# EAGLE board LargePanel_V01 (EAGLE 9.0.1), part 1 of 2
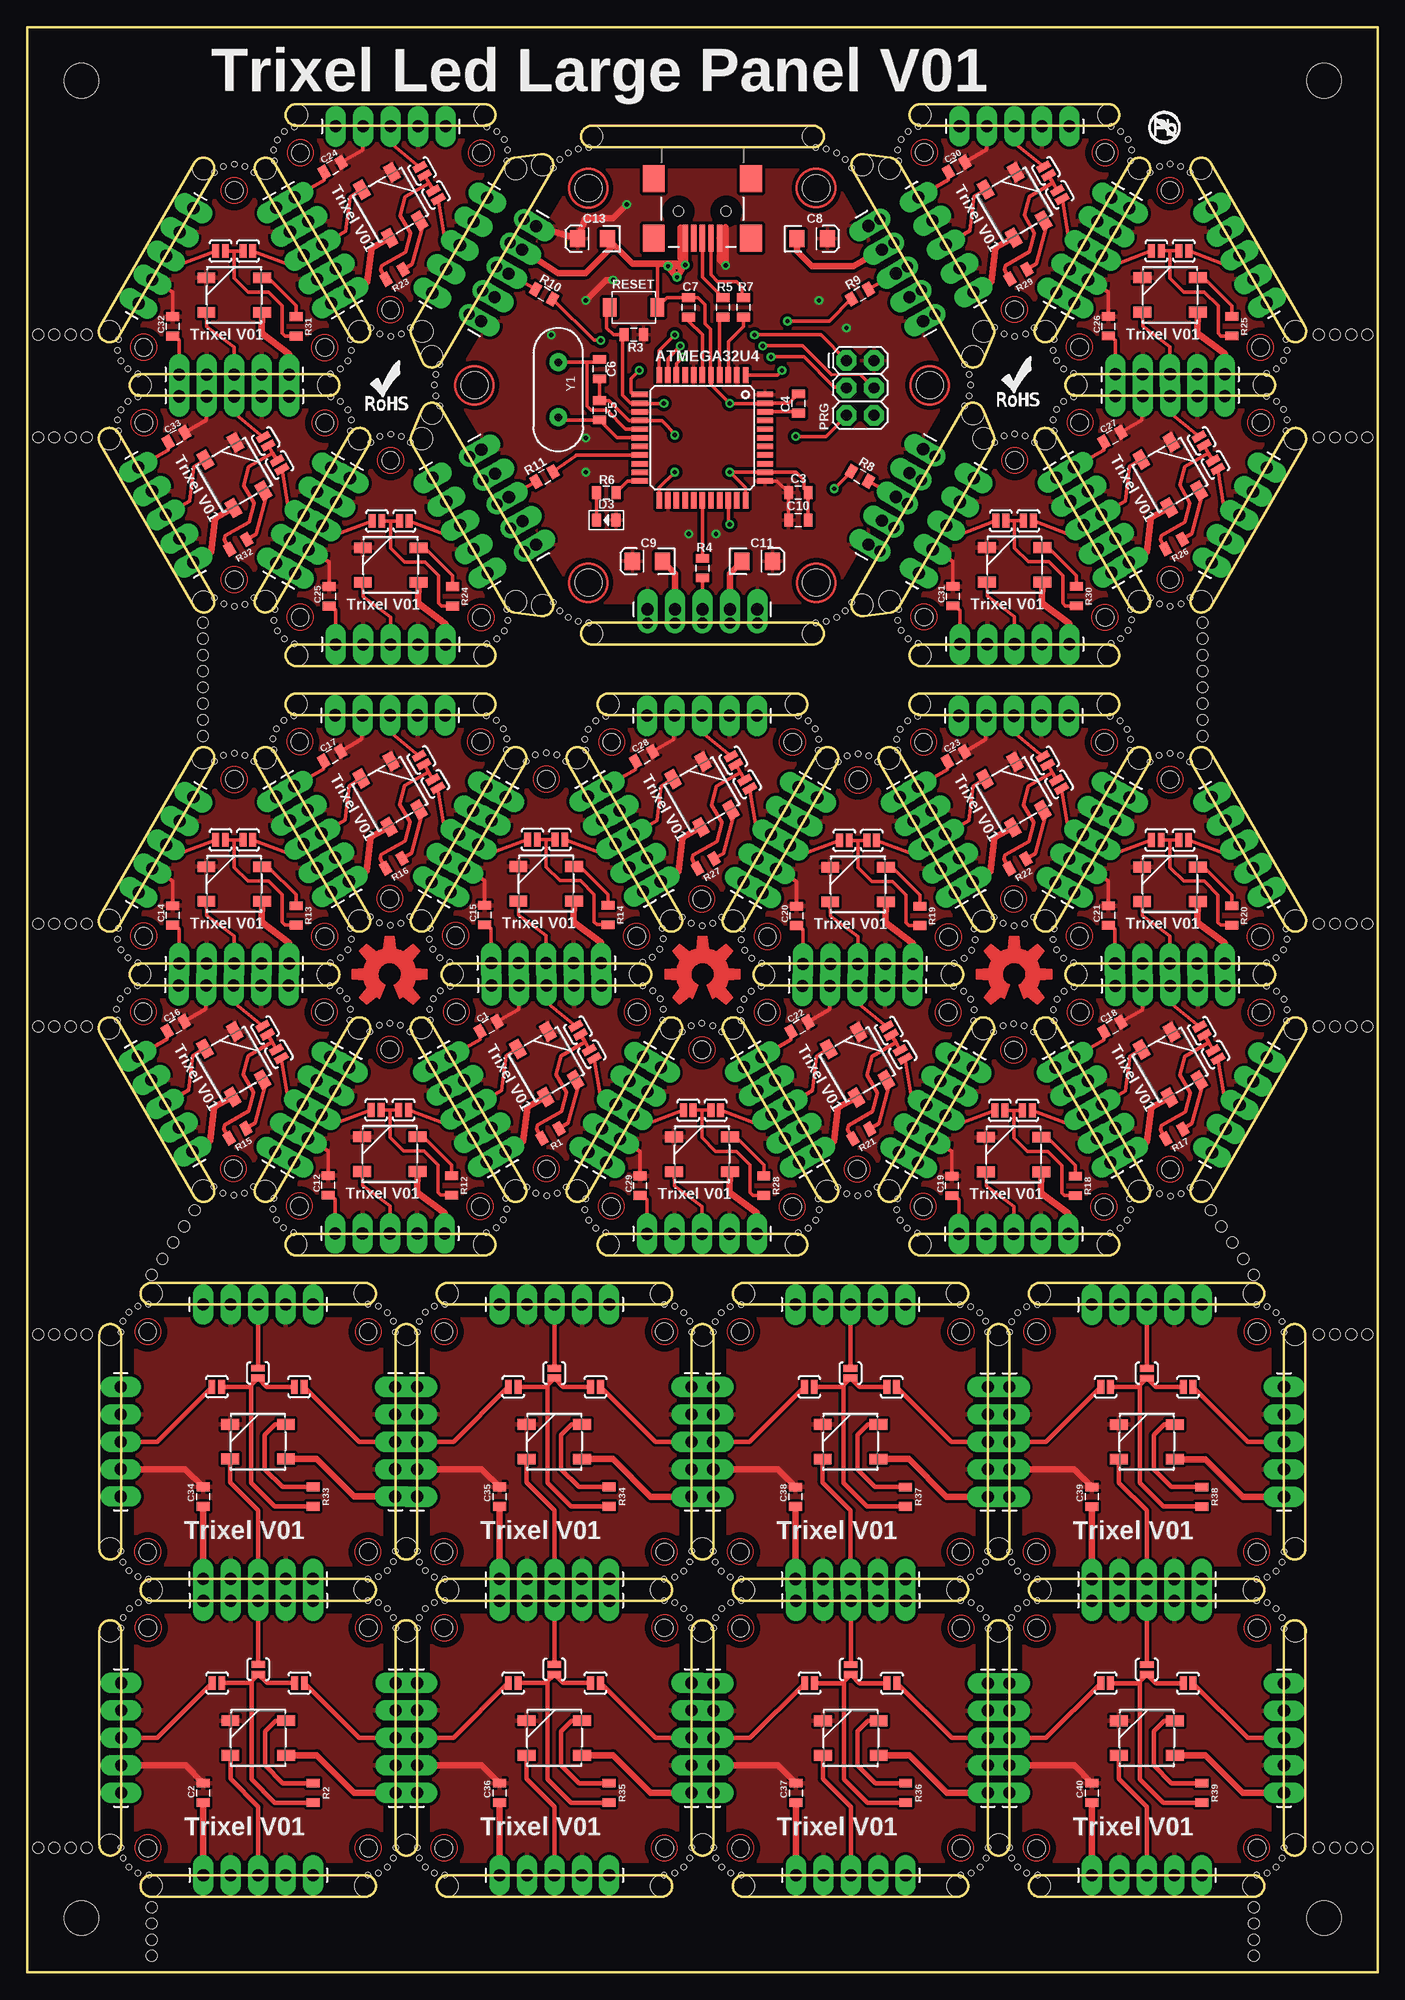
[diagram p0: board, top side]
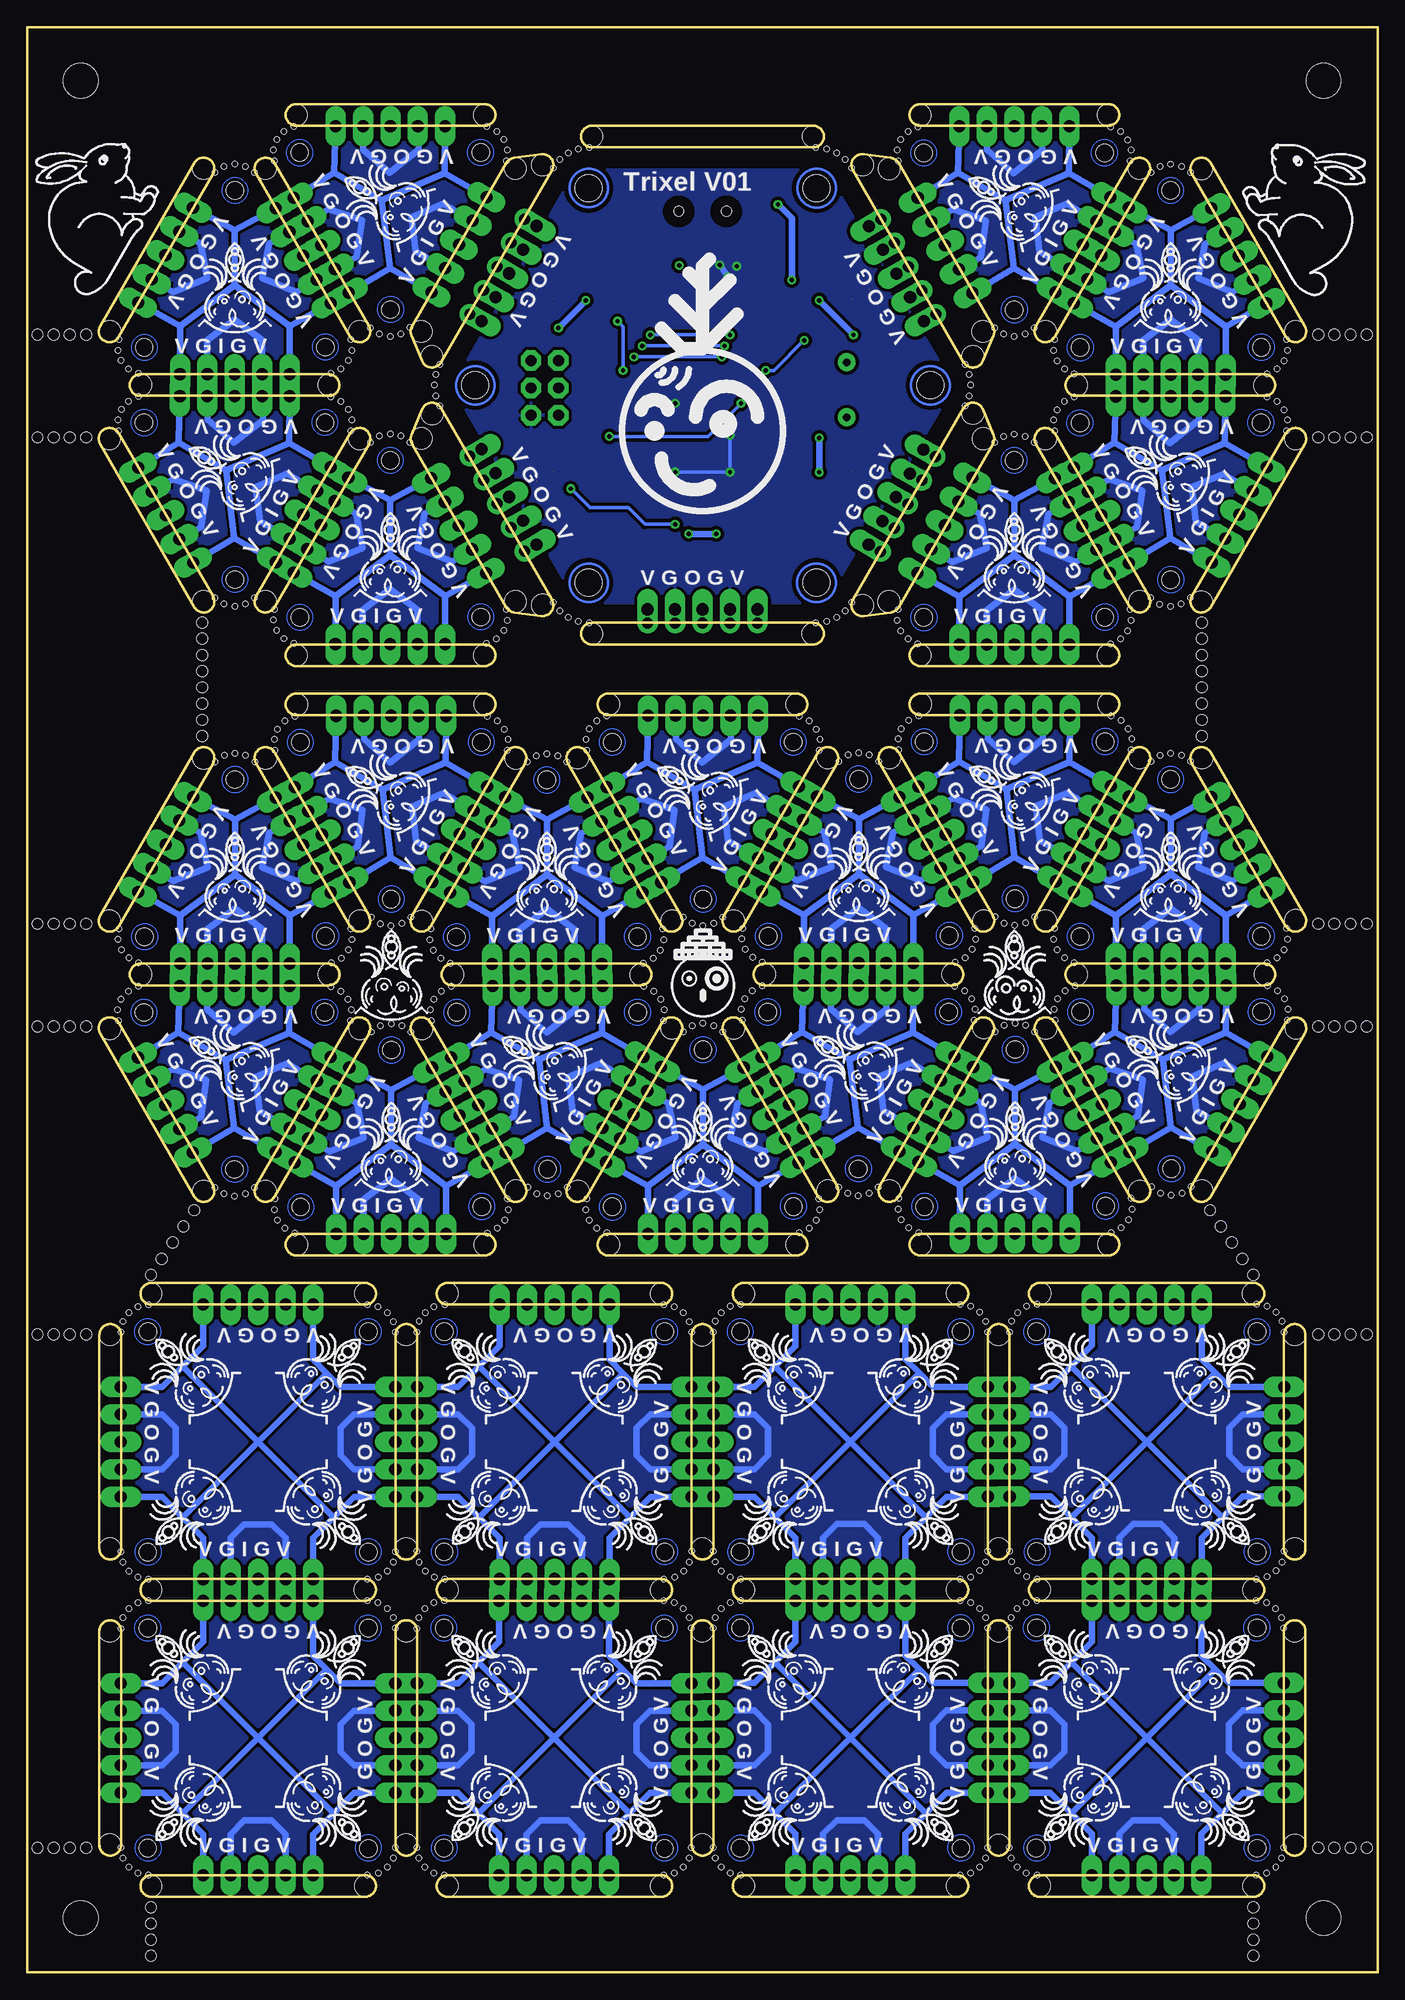
[diagram p1: board, bottom side, seen from below]

Size 125 x 180 mm. Coordinates in mm from the lower left corner, seen from the top.
Outline: 436 segments
Copper layers (1*16): Top 0.035mm / dielectric 1.5mm / Bottom 0.035mm
Design rules "default *": minimum track width 6mil, minimum drill 0.35mm, track to track 6mil, track to pad 6mil, pad to pad 6mil, via to via 6mil, smd to smd 6mil, copper to edge 40mil, drill to drill 6mil, minimum pad ring 10mil, minimum via ring 8mil, stop-mask expansion 4mil, vias tented up to drill 29mil, thermal gap 10mil
Net classes: 0 default: width 0.203 mm
Holes 1.6 mm at 39.71,88.87 56.46,88.86 48.07,74.34 11.19,11.49 11.19,31.89 31.61,11.51 31.59,31.89 25.19,70.89 33.58,85.4 41.96,70.87 10.79,95.88 19.18,110.38 27.56,95.85 39.66,95.91 48.04,110.41 56.42,95.88 10.75,88.88 27.51,88.88 19.11,74.35 25.23,113.88 41.98,113.87 33.59,99.35 97.43,88.83 114.18,88.82 105.79,74.3 82.91,70.85 91.3,85.35 99.68,70.82 68.51,95.83 76.89,110.34 85.28,95.81 97.38,95.86 105.76,110.37 114.14,95.84 68.47,88.84 85.23,88.83 76.83,74.31 82.95,113.83 99.7,113.82 91.31,99.3 25.28,168.36 42.04,168.36 33.64,153.83 25.27,125.39 33.65,139.89 42.03,125.36 97.39,150.38 105.77,164.88 114.15,150.35 97.41,143.4 114.17,143.39 105.77,128.87 54.09,113.84 70.84,113.83 62.45,99.31 54.07,70.86 62.45,85.37 70.84,70.84 83.02,168.38 99.77,168.38 91.38,153.85 83,125.41 91.39,139.91 99.77,125.38 10.79,150.36 19.18,164.87 27.56,150.34 10.82,143.38 27.57,143.38 19.18,128.85 11.16,38.9 11.16,59.3 31.59,38.92 31.56,59.3 38.58,38.89 38.58,59.29 59.01,38.92 58.98,59.29 38.58,11.49 38.58,31.89 59.01,11.51 58.98,31.89 66.01,11.48 66.01,31.88 86.44,11.5 86.41,31.88 65.99,38.89 65.99,59.29 86.41,38.91 86.39,59.29 93.41,38.88 93.41,59.28 113.83,38.91 113.81,59.28 93.41,11.48 93.41,31.88 113.83,11.5 113.81,31.88
Holes 0.5 mm at 39.17,91.27 38.24,90.84 37.58,90.07 37.25,89.12 37.34,88.1 46.25,72.67 47.09,72.1 48.08,71.88 49.08,72.09 49.9,72.67 58.82,88.11 58.9,89.12 58.58,90.08 57.91,90.84 56.99,91.28 9.46,33.67 10.29,34.22 11.27,34.41 8.9,32.83 8.71,31.85 31.55,34.41 32.53,34.22 33.36,33.66 33.92,32.84 34.11,31.84 8.71,11.57 8.9,10.58 9.45,9.76 10.28,9.2 11.28,9 31.55,9 32.53,9.2 33.36,9.75 33.92,10.59 34.11,11.57 38.2,144.95 37.81,145.88 37.68,146.87 37.81,147.86 38.2,148.78 48.69,166.95 49.29,167.74 50.09,168.35 51.01,168.73 52,168.86 72.98,168.86 73.97,168.73 74.9,168.35 75.69,167.74 76.3,166.95 86.78,148.78 87.17,147.86 87.3,146.87 87.17,145.87 86.78,144.95 76.29,126.78 75.69,125.99 74.9,125.38 73.97,125 72.98,124.87 52,124.87 51.01,125 50.08,125.38 49.29,125.99 48.69,126.78 22.84,71.62 22.75,70.6 23.08,69.65 23.75,68.89 24.67,68.46 42.49,68.46 43.4,68.9 44.09,69.65 44.41,70.62 44.32,71.62 35.4,87.06 34.57,87.63 33.58,87.84 32.58,87.63 31.75,87.06 8.44,96.6 8.35,95.59 8.68,94.64 9.35,93.87 10.27,93.44 28.09,93.44 29,93.89 29.69,94.64 30.01,95.6 29.92,96.6 21,112.05 20.17,112.62 19.18,112.82 18.18,112.62 17.35,112.05 37.31,96.63 37.22,95.62 37.55,94.67 38.21,93.9 39.14,93.47 56.96,93.47 57.87,93.92 58.56,94.67 58.87,95.63 58.78,96.63 49.87,112.08 49.03,112.65 48.04,112.85 47.05,112.65 46.21,112.08 10.21,91.28 9.28,90.85 8.62,90.09 8.29,89.13 8.38,88.12 17.29,72.68 18.13,72.12 19.13,71.9 20.12,72.1 20.94,72.68 29.86,88.12 29.94,89.14 29.62,90.1 28.95,90.85 28.03,91.29 24.68,116.27 23.76,115.84 23.1,115.08 22.77,114.13 22.86,113.11 31.77,97.68 32.61,97.11 33.6,96.89 34.59,97.1 35.42,97.67 44.33,113.12 44.41,114.13 44.09,115.09 43.42,115.84 42.51,116.28 96.89,91.22 95.96,90.79 95.3,90.03 94.97,89.08 95.06,88.06 103.97,72.63 104.81,72.06 105.8,71.84 106.8,72.05 107.62,72.62 116.54,88.07 116.62,89.08 116.3,90.04 115.63,90.79 114.71,91.23 80.56,71.57 80.47,70.56 80.8,69.61 81.47,68.84 82.39,68.41 100.21,68.41 101.12,68.86 101.81,69.61 102.13,70.57 102.04,71.57 93.12,87.02 92.29,87.59 91.3,87.79 90.3,87.59 89.47,87.02 66.16,96.56 66.07,95.54 66.4,94.59 67.07,93.83 67.99,93.4 85.81,93.4 86.72,93.84 87.41,94.59 87.73,95.56 87.64,96.56 78.72,112 77.89,112.57 76.89,112.78 75.9,112.57 75.07,112 95.03,96.59 94.94,95.57 95.27,94.62 95.93,93.86 96.86,93.43 114.68,93.43 115.59,93.87 116.28,94.62 116.59,95.59 116.5,96.59 107.59,112.03 106.75,112.6 105.76,112.81 104.77,112.6 103.93,112.03 67.93,91.24 67,90.8 66.34,90.04 66.01,89.09 66.1,88.07 75.01,72.64 75.85,72.07 76.85,71.85 77.84,72.06 78.66,72.64 87.58,88.08 87.66,89.09 87.34,90.05 86.67,90.81 85.75,91.25 82.4,116.23 81.48,115.8 80.82,115.03 80.49,114.08 80.58,113.06 89.49,97.63 90.33,97.06 91.32,96.84 92.31,97.05 93.14,97.63 102.05,113.07 102.13,114.08 101.81,115.04 101.14,115.8 100.23,116.24 24.74,170.76 23.81,170.33 23.15,169.57 22.82,168.61 22.91,167.6 31.82,152.16 32.66,151.59 33.65,151.38 34.65,151.58 35.47,152.16 44.39,167.6 44.47,168.62 44.15,169.58 43.48,170.33 42.56,170.77 22.92,126.11 22.83,125.1 23.16,124.14 23.82,123.38 24.75,122.95 42.57,122.95 43.48,123.4 44.17,124.14 44.48,125.11 44.39,126.11 35.48,141.56 34.64,142.13 33.65,142.33 32.66,142.13 31.82,141.56 95.04,151.1 94.95,150.09 95.28,149.13 95.94,148.37 96.87,147.94 114.69,147.94 115.6,148.39 116.29,149.13 116.6,150.1 116.51,151.1 107.6,166.55 106.76,167.12 105.77,167.32 104.78,167.12 103.94,166.55 96.87,145.8 95.94,145.36 95.28,144.6 94.95,143.65 95.04,142.63 103.95,127.2 104.79,126.63 105.78,126.41 106.78,126.62 107.6,127.2 116.52,142.64 116.6,143.65 116.28,144.61 115.61,145.37 114.69,145.81 53.54,116.24 52.62,115.8 51.96,115.04 51.63,114.09 51.72,113.07 60.63,97.64 61.47,97.07 62.46,96.85 63.45,97.06 64.28,97.64 73.2,113.08 73.27,114.09 72.95,115.05 72.28,115.81 71.37,116.25 51.72,71.59 51.63,70.57 51.96,69.62 52.63,68.86 53.55,68.43 71.37,68.43 72.28,68.87 72.97,69.62 73.29,70.59 73.2,71.59 64.28,87.03 63.45,87.6 62.45,87.81 61.46,87.6 60.63,87.03 82.47,170.78 81.55,170.35 80.89,169.59 80.56,168.63 80.65,167.62 89.56,152.18 90.4,151.61 91.39,151.4 92.38,151.6 93.21,152.18 102.13,167.62 102.2,168.64 101.88,169.6 101.21,170.35 100.3,170.79 80.65,126.13 80.56,125.12 80.89,124.17 81.56,123.4 82.48,122.97 100.3,122.97 101.21,123.42 101.9,124.17 102.22,125.13 102.13,126.13 93.21,141.58 92.38,142.15 91.39,142.35 90.39,142.15 89.56,141.58 8.44,151.09 8.35,150.07 8.68,149.12 9.35,148.36 10.27,147.93 28.09,147.93 29,148.37 29.69,149.12 30.01,150.09 29.92,151.09 21,166.53 20.17,167.1 19.18,167.31 18.18,167.1 17.35,166.53 10.27,145.78 9.35,145.35 8.69,144.59 8.36,143.63 8.45,142.62 17.36,127.18 18.2,126.61 19.19,126.4 20.18,126.6 21.01,127.18 29.93,142.62 30,143.64 29.68,144.6 29.01,145.35 28.1,145.79 9.43,61.08 10.27,61.63 11.25,61.82 8.88,60.24 8.68,59.26 31.53,61.82 32.51,61.63 33.34,61.07 33.89,60.25 34.09,59.25 8.68,38.98 8.88,37.99 9.42,37.17 10.26,36.61 11.25,36.41 31.52,36.41 32.5,36.61 33.34,37.16 33.89,38 34.09,38.98 36.85,61.07 37.69,61.63 38.67,61.81 36.3,60.24 36.11,59.26 58.95,61.81 59.93,61.63 60.76,61.06 61.31,60.25 61.51,59.25 36.11,38.97 36.3,37.98 36.84,37.16 37.68,36.6 38.67,36.41 58.94,36.41 59.92,36.6 60.76,37.16 61.31,37.99 61.51,38.97 36.85,33.67 37.69,34.22 38.67,34.41 36.3,32.83 36.11,31.85 58.95,34.41 59.93,34.22 60.76,33.66 61.31,32.84 61.51,31.84 36.11,11.57 36.3,10.58 36.84,9.76 37.68,9.2 38.67,9 58.94,9 59.92,9.2 60.76,9.75 61.31,10.59 61.51,11.57 64.28,33.66 65.12,34.21 66.1,34.4 63.73,32.82 63.54,31.84 86.38,34.4 87.36,34.21 88.19,33.65 88.74,32.83 88.94,31.83 63.54,11.56 63.73,10.57 64.27,9.75 65.11,9.19 66.1,8.99 86.37,8.99 87.35,9.19 88.19,9.74 88.74,10.58 88.94,11.56 64.26,61.07 65.09,61.62 66.07,61.81 63.7,60.23 63.51,59.25 86.35,61.81 87.33,61.62 88.16,61.06 88.72,60.24 88.91,59.24 63.51,38.97 63.7,37.98 64.25,37.16 65.08,36.6 66.08,36.4 86.35,36.4 87.33,36.6 88.16,37.15 88.72,37.99 88.91,38.97 91.68,61.06 92.51,61.62 93.49,61.8 91.12,60.23 90.93,59.25 113.77,61.8 114.75,61.62 115.58,61.05 116.14,60.24 116.33,59.24 90.93,38.96 91.12,37.97 91.67,37.15 92.5,36.59 93.5,36.4 113.77,36.4 114.75,36.59 115.58,37.15 116.14,37.98 116.33,38.96 91.68,33.66 92.51,34.21 93.49,34.4 91.12,32.82 90.93,31.84 113.77,34.4 114.75,34.21 115.58,33.65 116.14,32.83 116.33,31.83 90.93,11.56 91.12,10.57 91.67,9.75 92.5,9.19 93.5,8.99 113.77,8.99 114.75,9.19 115.58,9.74 116.14,10.58 116.33,11.56
Holes 2.5 mm at 73.03,128.61 51.95,128.58 83.55,146.85 73.03,165.08 51.95,165.08 41.41,146.85
Holes 2 mm at 11.51,8.01 7.69,11.8 7.7,31.61 11.5,35.41 31.29,35.42 35.1,31.59 38.93,35.4 35.1,39.21 31.3,8.02 35.1,11.8 38.9,8.01 58.69,8 66.31,8 62.53,11.83 86.12,8 89.93,11.81 93.7,7.99 113.52,8 117.34,11.82 117.35,31.6 113.53,35.41 93.75,35.41 89.92,31.61 86.11,35.4 89.93,39.22 117.33,39.21 62.52,31.59 58.7,35.4 62.51,39.23 66.31,35.39 7.69,39.22 7.69,59.01 11.52,62.81 31.27,62.82 35.11,59 38.9,62.82 58.71,62.79 66.32,62.81 62.52,58.98 86.1,62.82 89.92,59 93.7,62.8 113.53,62.8 117.33,59.01 27.87,92.34 30.76,97.31 36.49,97.32 39.36,92.36 36.48,87.41 30.73,87.39 59.62,97.32 65.32,97.28 68.18,92.31 65.31,87.36 59.61,87.37 56.76,92.36 88.46,97.26 94.21,97.3 97.05,92.33 94.19,87.35 88.46,87.33 85.61,92.33 30.75,151.85 27.89,146.87 30.76,141.91 36.53,141.92 37.47,144.25 37.47,149.52 36.55,151.83 87.53,149.51 88.54,151.83 94.23,151.82 97.06,146.88 94.22,141.91 88.52,141.93 87.52,144.2 42.32,117.36 45.17,112.41 50.9,112.39 53.77,117.32 52.27,123.85 47.7,126.49 45.24,126.84 42.36,121.87 72.75,123.86 77.29,126.52 79.82,126.84 82.66,121.87 82.61,117.32 79.78,112.35 74.05,112.38 71.18,117.33 16.3,112.39 22.05,112.4 24.9,117.36 24.94,121.87 22.06,126.83 16.33,126.82 108.67,126.83 102.93,126.85 100.07,121.87 100.05,117.31 102.91,112.37 108.65,112.37 7.62,97.33 10.45,92.36 7.58,87.38 16.3,72.31 22.03,72.3 24.89,67.36 42.32,67.36 45.19,72.32 50.92,72.31 53.78,67.34 71.17,67.35 74.02,72.29 79.76,72.31 82.62,67.34 100.03,67.34 102.93,72.28 108.66,72.28 117.35,87.35 114.49,92.33 117.36,97.3 7.62,141.91 10.48,146.85 7.62,151.82 16.34,166.89 22.07,166.9 24.95,171.87 42.36,171.84 45.22,166.89 47.7,167.24 52.26,169.88 72.74,169.86 77.29,167.23 79.82,166.92 82.66,171.87 100.09,171.87 102.93,166.91 108.65,166.9 117.35,151.83 114.48,146.88 117.36,141.92
Holes 1 mm at 11.53,6.03 11.53,4.53 11.53,3.03 11.53,1.53 5.53,11.53 4.03,11.53 2.53,11.53 1.03,11.53 113.53,6.03 113.53,4.53 113.53,3.03 113.53,1.53 119.53,11.53 121.03,11.53 122.53,11.53 124.03,11.53 119.53,59.03 121.03,59.03 122.53,59.03 124.03,59.03 5.53,59.03 4.03,59.03 2.53,59.03 1.03,59.03 5.53,151.53 4.03,151.53 2.53,151.53 1.03,151.53 119.53,151.53 121.03,151.53 122.53,151.53 124.03,151.53 119.53,142.03 121.03,142.03 122.53,142.03 124.03,142.03 5.53,142.03 4.03,142.03 2.53,142.03 1.03,142.03 1.03,97.03 2.53,97.03 4.03,97.03 5.53,97.03 1.03,87.53 2.53,87.53 4.03,87.53 5.53,87.53 119.53,97.03 121.03,97.03 122.53,97.03 124.03,97.03 119.53,87.53 121.03,87.53 122.53,87.53 124.03,87.53 16.28,124.91 16.28,123.41 16.28,121.91 16.28,120.41 16.28,118.91 16.28,117.41 16.28,115.91 16.28,114.41 108.78,124.91 108.78,123.41 108.78,121.91 108.78,120.41 108.78,118.91 108.78,117.41 108.78,115.91 108.78,114.41 15.53,70.53 14.53,69.03 13.53,67.53 12.53,66.03 11.53,64.53 109.53,70.53 110.53,69.03 111.53,67.53 112.53,66.03 113.53,64.53
Holes 3.2 mm at 5.03,5.03 120.03,5.03 120.03,175.03 5.03,175.03
tRestrict: area 46.2,134.4 to 46.4,134.6

## Footprints (pad centres in the part's own frame; a part is rotated, then mirrored left to right if it is on the bottom)
TQFP44 = smd 1.5 x 0.5: 1 -5.8,4; 2 -5.8,3.2; 3 -5.8,2.4; 4 -5.8,1.6; 5 -5.8,0.8; 6 -5.8,0; 7 -5.8,-0.8; 8 -5.8,-1.6; 9 -5.8,-2.4; 10 -5.8,-3.2; 11 -5.8,-4; 23 5.8,-4; 24 5.8,-3.2; 25 5.8,-2.4; 26 5.8,-1.6; 27 5.8,-0.8; 28 5.8,0; 29 5.8,0.8; 30 5.8,1.6; 31 5.8,2.4; 32 5.8,3.2; 33 5.8,4 | smd 0.5 x 1.5: 12 -4,-5.8; 13 -3.2,-5.8; 14 -2.4,-5.8; 15 -1.6,-5.8; 16 -0.8,-5.8; 17 0,-5.8; 18 0.8,-5.8; 19 1.6,-5.8; 20 2.4,-5.8; 21 3.2,-5.8; 22 4,-5.8; 34 4,5.8; 35 3.2,5.8; 36 2.4,5.8; 37 1.6,5.8; 38 0.8,5.8; 39 0,5.8; 40 -0.8,5.8; 41 -1.6,5.8; 42 -2.4,5.8; 43 -3.2,5.8; 44 -4,5.8
0805 = smd 0.8 x 1.2: 1 -0.9,0; 2 0.9,0
EIA3216 = smd 1.4 x 1.6: A 1.4,0; C -1.4,0
WS2812B = smd 1.651 x 1: 1 -2.577,1.6; 2 -2.577,-1.6; 3 2.577,-1.6; 4 2.577,1.6
LED-0805 = smd 0.889 x 1.27: + -0.889,0; - 0.889,0
1X05_LONGPADS = drill 1.118 pad 1.88 long: 1 0,0; 2 2.54,0; 3 5.08,0; 4 7.62,0; 5 10.16,0
USB-MINIB = smd 2.5 x 0.5: D+ 2.5,0; D- 2.5,0.8; GND 2.5,-1.6; ID 2.5,-0.8; VBUS 2.5,1.6 | smd 2.5 x 2: MTN1 -3,4.5; MTN2 2.5,4.5; MTN3 -3,-4.5; MTN4 2.5,-4.5 | hole 0.9: 0,2.2; 0,-2.2
1X05_NO_SILK = drill 1.016 pad 1.88: 1 0,0; 2 2.54,0; 3 5.08,0; 4 7.62,0; 5 10.16,0
PAD-JUMPER-2-NO_YES_SILK = smd 0.635 x 1.27: 1 -0.45,0; 2 0.45,0
2X3 = drill 1.016 pad 1.88 octagon: 1 0,0; 2 0,2.54; 3 2.54,0; 4 2.54,2.54; 5 5.08,0; 6 5.08,2.54
SW2-4.0X3.0X2.0 = smd 1.25 x 1.7: 1 -2.2,0; 2 2.2,0
HC49US = drill 0.7 pad 1.651: 1 -2.54,0; 2 2.54,0

## Placement (x,y rotation side)
ATMEGA32U4  ATMEGA32U4TQFP-44  [TQFP44]  62.49,142 270 top
C1  0.1uF  [0805]  42.72,87.53 210 top
C2  0.1uF  [0805]  16.32,16.62 270 top
C3  0.1uF  [0805]  71.38,136.91 180 top
C4  0.1uF  [0805]  71.38,145.17 270 top
C5  22pF  [0805]  52.97,144.53 90 top
C6  22pF  [0805]  52.97,148.34 270 top
C7  1uF  [0805]  61.22,154.06 270 top
C8  10uF  [EIA3216]  72.65,160.41 0 top
C9  10uF  [EIA3216]  57.41,130.56 180 top
C10  1uF  [0805]  71.38,134.38 0 top
C11  10uF  [EIA3216]  67.57,130.56 0 top
C12  0.1uF  [0805]  27.86,72.83 270 top
C13  10uF  [EIA3216]  52.33,160.41 180 top
C14  0.1uF  [0805]  13.46,97.81 270 top
C15  0.1uF  [0805]  42.33,97.84 270 top
C16  0.1uF  [0805]  13.76,87.54 210 top
C17  0.1uF  [0805]  28.23,112.53 210 top
C18  0.1uF  [0805]  100.44,87.48 210 top
C19  0.1uF  [0805]  85.58,72.78 270 top
C20  0.1uF  [0805]  71.18,97.77 270 top
C21  0.1uF  [0805]  100.05,97.8 270 top
C22  0.1uF  [0805]  71.48,87.49 210 top
C23  0.1uF  [0805]  85.95,112.49 210 top
C24  0.1uF  [0805]  28.29,167.02 210 top
C25  0.1uF  [0805]  27.94,127.32 270 top
C26  0.1uF  [0805]  100.06,152.31 270 top
C27  0.1uF  [0805]  100.42,142.05 210 top
C28  0.1uF  [0805]  57.09,112.49 210 top
C29  0.1uF  [0805]  56.74,72.8 270 top
C30  0.1uF  [0805]  86.02,167.04 210 top
C31  0.1uF  [0805]  85.67,127.34 270 top
C32  0.1uF  [0805]  13.46,152.29 270 top
C33  0.1uF  [0805]  13.82,142.04 210 top
C34  0.1uF  [0805]  16.3,44.03 270 top
C35  0.1uF  [0805]  43.72,44.02 270 top
C36  0.1uF  [0805]  43.72,16.62 270 top
C37  0.1uF  [0805]  71.14,16.61 270 top
C38  0.1uF  [0805]  71.12,44.02 270 top
C39  0.1uF  [0805]  98.54,44.02 270 top
C40  0.1uF  [0805]  98.54,16.61 270 top
D1  [WS2812B]  48.08,84.03 120 top
D2  [WS2812B]  21.4,21.7 180 top
D3  GREEN-0805  [LED-0805]  53.6,134.38 180 top
D4  [WS2812B]  33.58,75.72 180 top
D5  [WS2812B]  19.18,100.71 180 top
D6  [WS2812B]  48.04,100.74 180 top
D7  [WS2812B]  19.13,84.04 120 top
D8  [WS2812B]  33.6,109.03 120 top
D9  [WS2812B]  105.8,83.98 120 top
D10  [WS2812B]  91.3,75.68 180 top
D11  [WS2812B]  76.89,100.66 180 top
D12  [WS2812B]  105.76,100.69 180 top
D13  [WS2812B]  76.85,83.99 120 top
D14  [WS2812B]  91.32,108.99 120 top
D15  [WS2812B]  33.65,163.52 120 top
D16  [WS2812B]  33.65,130.22 180 top
D17  [WS2812B]  105.77,155.21 180 top
D18  [WS2812B]  105.78,138.55 120 top
D19  [WS2812B]  62.46,108.99 120 top
D20  [WS2812B]  62.45,75.69 180 top
D21  [WS2812B]  91.39,163.54 120 top
D22  [WS2812B]  91.39,130.24 180 top
D23  [WS2812B]  19.18,155.19 180 top
D24  [WS2812B]  19.19,138.54 120 top
D25  [WS2812B]  21.38,49.11 180 top
D26  [WS2812B]  48.8,49.11 180 top
D27  [WS2812B]  48.8,21.7 180 top
D28  [WS2812B]  76.22,21.69 180 top
D29  [WS2812B]  76.2,49.1 180 top
D30  [WS2812B]  103.62,49.09 180 top
D31  [WS2812B]  103.62,21.69 180 top
E$1  [NO_PB_LOGO_0.120]  103.53,168.81 0 top
E$2  [OSHW-LOGO-L_COPPER]  33.56,92.36 0 top
E$3  [OSHW-LOGO-L_COPPER]  62.51,92.36 0 top
E$4  [OSHW-LOGO-L_COPPER]  91.34,92.36 0 top
E$6  [ROHS_LOGO_0.18_IN]  89.56,144.81 0 top
E$7  [ROHS_LOGO_0.18_IN]  31.14,144.43 0 top
J1  [1X05_LONGPADS]  51.94,75.9 60 top
J2  [1X05_LONGPADS]  42.99,91.31 0 top
J3  USB-MINIB-5PIN  [USB-MINIB]  62.49,162.95 270 top
J4  [1X05_LONGPADS]  39.19,84.75 300 top
J5  [1X05_LONGPADS]  8.7,16.62 90 top
J6  [1X05_LONGPADS]  34.1,16.62 90 top
J7  [1X05_LONGPADS]  16.32,34.4 0 top
J8  [1X05_LONGPADS]  16.32,9 0 top
J9  [1X05_NO_SILK]  67.57,124.85 180 top
J10  [1X05_LONGPADS]  67.57,126.12 180 top
J11  [1X05_NO_SILK]  78.94,131.49 60 top
J12  [1X05_LONGPADS]  77.84,132.13 60 top
J13  [1X05_NO_SILK]  84.02,153.43 120 top
J14  [1X05_LONGPADS]  82.92,152.8 120 top
J15  [1X05_NO_SILK]  45.99,162.22 240 top
J16  [1X05_LONGPADS]  47.09,161.59 240 top
J17  [1X05_NO_SILK]  40.94,140.26 300 top
J18  [1X05_LONGPADS]  42.04,140.89 300 top
J19  [1X05_LONGPADS]  28.5,68.38 0 top
J20  [1X05_LONGPADS]  42.53,75 120 top
J21  [1X05_LONGPADS]  24.72,74.95 60 top
J22  [1X05_LONGPADS]  14.09,93.36 0 top
J23  [1X05_LONGPADS]  28.13,99.98 120 top
J24  [1X05_LONGPADS]  10.32,99.94 60 top
J25  [1X05_LONGPADS]  42.96,93.39 0 top
J26  [1X05_LONGPADS]  57,100.01 120 top
J27  [1X05_LONGPADS]  39.18,99.97 60 top
J28  [1X05_LONGPADS]  10.23,84.77 300 top
J29  [1X05_LONGPADS]  22.98,75.92 60 top
J30  [1X05_LONGPADS]  14.03,91.32 0 top
J31  [1X05_LONGPADS]  24.7,109.76 300 top
J32  [1X05_LONGPADS]  37.45,100.91 60 top
J33  [1X05_LONGPADS]  28.51,116.32 0 top
J34  [1X05_LONGPADS]  96.91,84.71 300 top
J35  [1X05_LONGPADS]  109.66,75.86 60 top
J36  [1X05_LONGPADS]  100.71,91.27 0 top
J37  [1X05_LONGPADS]  86.22,68.34 0 top
J38  [1X05_LONGPADS]  100.25,74.95 120 top
J39  [1X05_LONGPADS]  82.44,74.91 60 top
J40  [1X05_LONGPADS]  71.81,93.32 0 top
J41  [1X05_LONGPADS]  85.85,99.94 120 top
J42  [1X05_LONGPADS]  68.04,99.89 60 top
J43  [1X05_LONGPADS]  100.68,93.35 0 top
J44  [1X05_LONGPADS]  114.72,99.97 120 top
J45  [1X05_LONGPADS]  96.9,99.92 60 top
J46  [1X05_LONGPADS]  67.95,84.72 300 top
J47  [1X05_LONGPADS]  80.7,75.87 60 top
J48  [1X05_LONGPADS]  71.75,91.28 0 top
J49  [1X05_LONGPADS]  82.42,109.71 300 top
J50  [1X05_LONGPADS]  95.17,100.86 60 top
J51  [1X05_LONGPADS]  86.23,116.27 0 top
J52  [1X05_LONGPADS]  24.76,164.25 300 top
J53  [1X05_LONGPADS]  37.51,155.4 60 top
J54  [1X05_LONGPADS]  28.56,170.8 0 top
J55  [1X05_LONGPADS]  28.57,122.88 0 top
J56  [1X05_LONGPADS]  42.61,129.49 120 top
J57  [1X05_LONGPADS]  24.79,129.45 60 top
J58  [1X05_LONGPADS]  100.69,147.87 0 top
J59  [1X05_LONGPADS]  114.73,154.48 120 top
J60  [1X05_LONGPADS]  96.91,154.44 60 top
J61  [1X05_LONGPADS]  96.89,139.28 300 top
J62  [1X05_LONGPADS]  109.64,130.43 60 top
J63  [1X05_LONGPADS]  100.69,145.84 0 top
J64  [1X05_LONGPADS]  53.56,109.72 300 top
J65  [1X05_LONGPADS]  66.31,100.87 60 top
J66  [1X05_LONGPADS]  57.37,116.28 0 top
J67  [1X05_LONGPADS]  57.38,68.35 0 top
J68  [1X05_LONGPADS]  71.41,74.97 120 top
J69  [1X05_LONGPADS]  53.6,74.92 60 top
J70  [1X05_LONGPADS]  82.49,164.27 300 top
J71  [1X05_LONGPADS]  95.24,155.42 60 top
J72  [1X05_LONGPADS]  86.3,170.82 0 top
J73  [1X05_LONGPADS]  86.31,122.89 0 top
J74  [1X05_LONGPADS]  100.34,129.51 120 top
J75  [1X05_LONGPADS]  82.53,129.47 60 top
J76  [1X05_LONGPADS]  14.09,147.85 0 top
J77  [1X05_LONGPADS]  28.13,154.47 120 top
J78  [1X05_LONGPADS]  10.32,154.42 60 top
J79  [1X05_LONGPADS]  10.29,139.27 300 top
J80  [1X05_LONGPADS]  23.04,130.42 60 top
J81  [1X05_LONGPADS]  14.1,145.82 0 top
J82  [1X05_LONGPADS]  8.67,44.03 90 top
J83  [1X05_LONGPADS]  34.08,44.03 90 top
J84  [1X05_LONGPADS]  16.3,61.81 0 top
J85  [1X05_LONGPADS]  16.3,36.41 0 top
J86  [1X05_LONGPADS]  36.09,44.02 90 top
J87  [1X05_LONGPADS]  61.5,44.02 90 top
J88  [1X05_LONGPADS]  43.72,61.8 0 top
J89  [1X05_LONGPADS]  43.72,36.41 0 top
J90  [1X05_LONGPADS]  36.09,16.62 90 top
J91  [1X05_LONGPADS]  61.5,16.62 90 top
J92  [1X05_LONGPADS]  43.72,34.4 0 top
J93  [1X05_LONGPADS]  43.72,9 0 top
J94  [1X05_LONGPADS]  63.52,16.61 90 top
J95  [1X05_LONGPADS]  88.92,16.61 90 top
J96  [1X05_LONGPADS]  71.14,34.39 0 top
J97  [1X05_LONGPADS]  71.14,8.99 0 top
J98  [1X05_LONGPADS]  63.5,44.02 90 top
J99  [1X05_LONGPADS]  88.9,44.02 90 top
J100  [1X05_LONGPADS]  71.12,61.8 0 top
J101  [1X05_LONGPADS]  71.12,36.4 0 top
J102  [1X05_LONGPADS]  90.92,44.02 90 top
J103  [1X05_LONGPADS]  116.32,44.02 90 top
J104  [1X05_LONGPADS]  98.54,61.8 0 top
J105  [1X05_LONGPADS]  98.54,36.4 0 top
J106  [1X05_LONGPADS]  90.92,16.61 90 top
J107  [1X05_LONGPADS]  116.32,16.61 90 top
J108  [1X05_LONGPADS]  98.54,34.39 0 top
J109  [1X05_LONGPADS]  98.54,8.99 0 top
JP1  JUMPER-PAD-2-NOYES_SILK  [PAD-JUMPER-2-NO_YES_SILK]  50.99,87.17 120 top
JP2  JUMPER-PAD-2-NOYES_SILK  [PAD-JUMPER-2-NO_YES_SILK]  52.26,84.97 300 top
JP3  JUMPER-PAD-2-NOYES_SILK  [PAD-JUMPER-2-NO_YES_SILK]  25.21,26.78 0 top
JP4  JUMPER-PAD-2-NOYES_SILK  [PAD-JUMPER-2-NO_YES_SILK]  21.4,28.05 90 top
JP5  JUMPER-PAD-2-NOYES_SILK  [PAD-JUMPER-2-NO_YES_SILK]  17.59,26.78 180 top
JP6  JUMPER-PAD-2-NOYES_SILK  [PAD-JUMPER-2-NO_YES_SILK]  32.3,79.81 180 top
JP7  JUMPER-PAD-2-NOYES_SILK  [PAD-JUMPER-2-NO_YES_SILK]  34.84,79.81 0 top
JP8  JUMPER-PAD-2-NOYES_SILK  [PAD-JUMPER-2-NO_YES_SILK]  17.91,104.8 180 top
JP9  JUMPER-PAD-2-NOYES_SILK  [PAD-JUMPER-2-NO_YES_SILK]  20.45,104.8 0 top
JP10  JUMPER-PAD-2-NOYES_SILK  [PAD-JUMPER-2-NO_YES_SILK]  46.77,104.83 180 top
JP11  JUMPER-PAD-2-NOYES_SILK  [PAD-JUMPER-2-NO_YES_SILK]  49.31,104.83 0 top
JP12  JUMPER-PAD-2-NOYES_SILK  [PAD-JUMPER-2-NO_YES_SILK]  22.03,87.18 120 top
JP13  JUMPER-PAD-2-NOYES_SILK  [PAD-JUMPER-2-NO_YES_SILK]  23.3,84.98 300 top
JP14  JUMPER-PAD-2-NOYES_SILK  [PAD-JUMPER-2-NO_YES_SILK]  36.51,112.18 120 top
JP15  JUMPER-PAD-2-NOYES_SILK  [PAD-JUMPER-2-NO_YES_SILK]  37.78,109.98 300 top
JP16  JUMPER-PAD-2-NOYES_SILK  [PAD-JUMPER-2-NO_YES_SILK]  108.71,87.13 120 top
JP17  JUMPER-PAD-2-NOYES_SILK  [PAD-JUMPER-2-NO_YES_SILK]  109.98,84.93 300 top
JP18  JUMPER-PAD-2-NOYES_SILK  [PAD-JUMPER-2-NO_YES_SILK]  90.03,79.77 180 top
JP19  JUMPER-PAD-2-NOYES_SILK  [PAD-JUMPER-2-NO_YES_SILK]  92.56,79.77 0 top
JP20  JUMPER-PAD-2-NOYES_SILK  [PAD-JUMPER-2-NO_YES_SILK]  75.62,104.75 180 top
JP21  JUMPER-PAD-2-NOYES_SILK  [PAD-JUMPER-2-NO_YES_SILK]  78.17,104.75 0 top
JP22  JUMPER-PAD-2-NOYES_SILK  [PAD-JUMPER-2-NO_YES_SILK]  104.49,104.78 180 top
JP23  JUMPER-PAD-2-NOYES_SILK  [PAD-JUMPER-2-NO_YES_SILK]  107.03,104.78 0 top
JP24  JUMPER-PAD-2-NOYES_SILK  [PAD-JUMPER-2-NO_YES_SILK]  79.75,87.14 120 top
JP25  JUMPER-PAD-2-NOYES_SILK  [PAD-JUMPER-2-NO_YES_SILK]  81.02,84.94 300 top
JP26  JUMPER-PAD-2-NOYES_SILK  [PAD-JUMPER-2-NO_YES_SILK]  94.23,112.13 120 top
JP27  JUMPER-PAD-2-NOYES_SILK  [PAD-JUMPER-2-NO_YES_SILK]  95.5,109.93 300 top
JP28  JUMPER-PAD-2-NOYES_SILK  [PAD-JUMPER-2-NO_YES_SILK]  36.56,166.66 120 top
JP29  JUMPER-PAD-2-NOYES_SILK  [PAD-JUMPER-2-NO_YES_SILK]  37.83,164.46 300 top
JP30  JUMPER-PAD-2-NOYES_SILK  [PAD-JUMPER-2-NO_YES_SILK]  32.38,134.31 180 top
JP31  JUMPER-PAD-2-NOYES_SILK  [PAD-JUMPER-2-NO_YES_SILK]  34.92,134.31 0 top
JP32  JUMPER-PAD-2-NOYES_SILK  [PAD-JUMPER-2-NO_YES_SILK]  104.5,159.29 180 top
JP33  JUMPER-PAD-2-NOYES_SILK  [PAD-JUMPER-2-NO_YES_SILK]  107.04,159.29 0 top
JP34  JUMPER-PAD-2-NOYES_SILK  [PAD-JUMPER-2-NO_YES_SILK]  108.69,141.7 120 top
JP35  JUMPER-PAD-2-NOYES_SILK  [PAD-JUMPER-2-NO_YES_SILK]  109.96,139.5 300 top
JP36  JUMPER-PAD-2-NOYES_SILK  [PAD-JUMPER-2-NO_YES_SILK]  65.37,112.14 120 top
JP37  JUMPER-PAD-2-NOYES_SILK  [PAD-JUMPER-2-NO_YES_SILK]  66.64,109.94 300 top
JP38  JUMPER-PAD-2-NOYES_SILK  [PAD-JUMPER-2-NO_YES_SILK]  61.19,79.78 180 top
JP39  JUMPER-PAD-2-NOYES_SILK  [PAD-JUMPER-2-NO_YES_SILK]  63.73,79.78 0 top
JP40  JUMPER-PAD-2-NOYES_SILK  [PAD-JUMPER-2-NO_YES_SILK]  94.3,166.68 120 top
JP41  JUMPER-PAD-2-NOYES_SILK  [PAD-JUMPER-2-NO_YES_SILK]  95.57,164.48 300 top
JP42  JUMPER-PAD-2-NOYES_SILK  [PAD-JUMPER-2-NO_YES_SILK]  90.11,134.32 180 top
JP43  JUMPER-PAD-2-NOYES_SILK  [PAD-JUMPER-2-NO_YES_SILK]  92.66,134.32 0 top
JP44  JUMPER-PAD-2-NOYES_SILK  [PAD-JUMPER-2-NO_YES_SILK]  17.91,159.28 180 top
JP45  JUMPER-PAD-2-NOYES_SILK  [PAD-JUMPER-2-NO_YES_SILK]  20.45,159.28 0 top
JP46  JUMPER-PAD-2-NOYES_SILK  [PAD-JUMPER-2-NO_YES_SILK]  22.1,141.68 120 top
JP47  JUMPER-PAD-2-NOYES_SILK  [PAD-JUMPER-2-NO_YES_SILK]  23.37,139.48 300 top
JP48  JUMPER-PAD-2-NOYES_SILK  [PAD-JUMPER-2-NO_YES_SILK]  25.19,54.19 0 top
JP49  JUMPER-PAD-2-NOYES_SILK  [PAD-JUMPER-2-NO_YES_SILK]  21.38,55.46 90 top
JP50  JUMPER-PAD-2-NOYES_SILK  [PAD-JUMPER-2-NO_YES_SILK]  17.57,54.19 180 top
JP51  JUMPER-PAD-2-NOYES_SILK  [PAD-JUMPER-2-NO_YES_SILK]  52.61,54.19 0 top
JP52  JUMPER-PAD-2-NOYES_SILK  [PAD-JUMPER-2-NO_YES_SILK]  48.8,55.45 90 top
JP53  JUMPER-PAD-2-NOYES_SILK  [PAD-JUMPER-2-NO_YES_SILK]  44.98,54.19 180 top
JP54  JUMPER-PAD-2-NOYES_SILK  [PAD-JUMPER-2-NO_YES_SILK]  52.61,26.78 0 top
JP55  JUMPER-PAD-2-NOYES_SILK  [PAD-JUMPER-2-NO_YES_SILK]  48.8,28.05 90 top
JP56  JUMPER-PAD-2-NOYES_SILK  [PAD-JUMPER-2-NO_YES_SILK]  44.98,26.78 180 top
JP57  JUMPER-PAD-2-NOYES_SILK  [PAD-JUMPER-2-NO_YES_SILK]  80.03,26.77 0 top
JP58  JUMPER-PAD-2-NOYES_SILK  [PAD-JUMPER-2-NO_YES_SILK]  76.22,28.04 90 top
JP59  JUMPER-PAD-2-NOYES_SILK  [PAD-JUMPER-2-NO_YES_SILK]  72.42,26.77 180 top
JP60  JUMPER-PAD-2-NOYES_SILK  [PAD-JUMPER-2-NO_YES_SILK]  80.01,54.18 0 top
JP61  JUMPER-PAD-2-NOYES_SILK  [PAD-JUMPER-2-NO_YES_SILK]  76.2,55.45 90 top
JP62  JUMPER-PAD-2-NOYES_SILK  [PAD-JUMPER-2-NO_YES_SILK]  72.39,54.18 180 top
JP63  JUMPER-PAD-2-NOYES_SILK  [PAD-JUMPER-2-NO_YES_SILK]  107.43,54.18 0 top
JP64  JUMPER-PAD-2-NOYES_SILK  [PAD-JUMPER-2-NO_YES_SILK]  103.62,55.45 90 top
JP65  JUMPER-PAD-2-NOYES_SILK  [PAD-JUMPER-2-NO_YES_SILK]  99.81,54.18 180 top
JP66  JUMPER-PAD-2-NOYES_SILK  [PAD-JUMPER-2-NO_YES_SILK]  107.43,26.77 0 top
JP67  JUMPER-PAD-2-NOYES_SILK  [PAD-JUMPER-2-NO_YES_SILK]  103.62,28.04 90 top
JP68  JUMPER-PAD-2-NOYES_SILK  [PAD-JUMPER-2-NO_YES_SILK]  99.81,26.77 180 top
PRG  AVR_SPI_PRG_6PTH  [2X3]  75.83,149.15 270 top
R1  1k  [0805]  48.43,77.63 210 top
R2  [0805]  26.48,16.62 270 top
R3  10K  [0805]  56.14,151.52 0 top
R4  1k  [0805]  62.49,129.93 270 top
R5  22  [0805]  64.39,154.06 90 top
R6  1k  [0805]  53.6,136.91 180 top
R7  22  [0805]  66.3,154.06 90 top
R8  1k  [0805]  77.08,138.43 330 top
R9  1k  [0805]  77.08,155.29 30 top
R10  1k  [0805]  47.84,155.28 150 top
R11  1k  [0805]  47.88,138.4 210 top
R12  1k  [0805]  39.29,72.83 270 top
R13  1k  [0805]  24.89,97.81 270 top
R14  1k  [0805]  53.76,97.84 270 top
R15  1k  [0805]  19.48,77.64 210 top
R16  1k  [0805]  33.95,102.63 210 top
R17  1k  [0805]  106.15,77.58 210 top
R18  1k  [0805]  97.01,72.78 270 top
R19  1k  [0805]  82.61,97.77 270 top
R20  1k  [0805]  111.47,97.8 270 top
R21  1k  [0805]  77.2,77.6 210 top
R22  1k  [0805]  91.67,102.59 210 top
R23  1k  [0805]  34,157.12 210 top
R24  1k  [0805]  39.37,127.32 270 top
R25  1k  [0805]  111.48,152.31 270 top
R26  1k  [0805]  106.13,132.16 210 top
R27  1k  [0805]  62.81,102.6 210 top
R28  1k  [0805]  68.17,72.8 270 top
R29  1k  [0805]  91.74,157.14 210 top
R30  1k  [0805]  97.1,127.34 270 top
R31  1k  [0805]  24.89,152.29 270 top
R32  1k  [0805]  19.54,132.14 210 top
R33  [0805]  26.46,44.03 270 top
R34  [0805]  53.88,44.02 270 top
R35  [0805]  53.88,16.62 270 top
R36  [0805]  81.31,16.61 270 top
R37  [0805]  81.28,44.02 270 top
R38  [0805]  108.7,44.02 270 top
R39  [0805]  108.7,16.61 270 top
RESET  B3U-1000P-2P-SMD  [SW2-4.0X3.0X2.0]  56.14,154.06 180 top
Y1  16MHz  [HC49US]  49.16,146.44 270 top

## Library data of the parts
ATMEGA32U4 = SparkFun-DigitalIC
C1 C2 C12 C14-C40 = SparkFun-Capacitors
C3-C11 C13 R3-R11 Y1 = SparkFun
D1 D2 D4-D31 = SparkFun-LED; PROD_ID: DIO-12503
D3 = Seeed-LED-2016; MPN: 17-215SYGC/S530-E2/TR8
E$1-E$4 E$6 E$7 = SparkFun-Aesthetics
J1 J2 J4-J109 PRG = SparkFun-Connectors
J3 = SparkFun-Connectors; PROD_ID: CONN-08193
JP1-JP68 = SparkFun-Passives
R1 R2 R12-R39 = SparkFun-Resistors
RESET = SMD_Button_Custom; MPN: B3U-1000P-2P-SMD

## Nets
5V [vcc]: ATMEGA32U4.2 ATMEGA32U4.7 ATMEGA32U4.14 ATMEGA32U4.24 ATMEGA32U4.34 ATMEGA32U4.44 C3.2 C8.A C9.A C10.1 C11.A C13.A D3.+ J3.VBUS J9.1 J9.5 J10.1 J10.5 J11.1 J11.5 J12.1 J12.5 J13.1 J13.5 J14.1 J14.5 J15.1 J15.5 J16.1 J16.5 J17.1 J17.5 J18.1 J18.5 PRG.2 R3.2
A0: ATMEGA32U4.36
A1: ATMEGA32U4.37
A2: ATMEGA32U4.38
A3: ATMEGA32U4.39
A4: ATMEGA32U4.40
A5: ATMEGA32U4.41
AREF: ATMEGA32U4.42 C4.2
D2_SDA: ATMEGA32U4.19 R11.1
D3_SCL: ATMEGA32U4.18
D4: ATMEGA32U4.25
D5: ATMEGA32U4.31 R8.1
D6: ATMEGA32U4.27
D7: ATMEGA32U4.1 R9.1
D8: ATMEGA32U4.28 R4.1
D9: ATMEGA32U4.29
D10: ATMEGA32U4.30
D11: ATMEGA32U4.12 R10.1
D12: ATMEGA32U4.26
D13: ATMEGA32U4.32
D14: ATMEGA32U4.8
D+: ATMEGA32U4.4 R5.1
D-: ATMEGA32U4.3 R7.1
DIN: D1.4 J4.3
DIN1: D2.4 J8.3
DIN2: D4.4 J19.3
DIN3: D5.4 J22.3
DIN4: D6.4 J25.3
DIN5: D7.4 J28.3
DIN6: D8.4 J31.3
DIN7: D9.4 J34.3
DIN8: D10.4 J37.3
DIN9: D11.4 J40.3
DIN10: D12.4 J43.3
DIN11: D13.4 J46.3
DIN12: D14.4 J49.3
DIN13: D15.4 J52.3
DIN14: D16.4 J55.3
DIN15: D17.4 J58.3
DIN16: D18.4 J61.3
DIN17: D19.4 J64.3
DIN18: D20.4 J67.3
DIN19: D21.4 J70.3
DIN20: D22.4 J73.3
DIN21: D23.4 J76.3
DIN22: D24.4 J79.3
DIN23: D25.4 J85.3
DIN24: D26.4 J89.3
DIN25: D27.4 J93.3
DIN26: D28.4 J97.3
DIN27: D29.4 J101.3
DIN28: D30.4 J105.3
DIN29: D31.4 J109.3
DOUT: JP1.1 JP2.1 R1.2
DOUT1: JP3.1 JP4.1 JP5.1 R2.2
DOUT2: JP6.1 JP7.1 R12.2
DOUT3: JP8.1 JP9.1 R13.2
DOUT4: JP10.1 JP11.1 R14.2
DOUT5: JP12.1 JP13.1 R15.2
DOUT6: JP14.1 JP15.1 R16.2
DOUT7: JP16.1 JP17.1 R17.2
DOUT8: JP18.1 JP19.1 R18.2
DOUT9: JP20.1 JP21.1 R19.2
DOUT10: JP22.1 JP23.1 R20.2
DOUT11: JP24.1 JP25.1 R21.2
DOUT12: JP26.1 JP27.1 R22.2
DOUT13: JP28.1 JP29.1 R23.2
DOUT14: JP30.1 JP31.1 R24.2
DOUT15: JP32.1 JP33.1 R25.2
DOUT16: JP34.1 JP35.1 R26.2
DOUT17: JP36.1 JP37.1 R27.2
DOUT18: JP38.1 JP39.1 R28.2
DOUT19: JP40.1 JP41.1 R29.2
DOUT20: JP42.1 JP43.1 R30.2
DOUT21: JP44.1 JP45.1 R31.2
DOUT22: JP46.1 JP47.1 R32.2
DOUT23: JP48.1 JP49.1 JP50.1 R33.2
DOUT24: JP51.1 JP52.1 JP53.1 R34.2
DOUT25: JP54.1 JP55.1 JP56.1 R35.2
DOUT26: JP57.1 JP58.1 JP59.1 R36.2
DOUT27: JP60.1 JP61.1 JP62.1 R37.2
DOUT28: JP63.1 JP64.1 JP65.1 R38.2
DOUT29: JP66.1 JP67.1 JP68.1 R39.2
GND: C1.1 D1.3 J1.2 J1.4 J2.2 J2.4 J4.2 J4.4
GND1: C2.1 D2.3 J5.2 J5.4 J6.2 J6.4 J7.2 J7.4 J8.2 J8.4
GND2: ATMEGA32U4.5 ATMEGA32U4.15 ATMEGA32U4.23 ATMEGA32U4.33 ATMEGA32U4.35 ATMEGA32U4.43 C3.1 C4.1 C5.2 C6.2 C7.1 C8.C C9.C C10.2 C11.C C13.C J3.GND J9.2 J9.4 J10.2 J10.4 J11.2 J11.4 J12.2 J12.4 J13.2 J13.4 J14.2 J14.4 J15.2 J15.4 J16.2 J16.4 J17.2 J17.4 J18.2 J18.4 PRG.6 RESET.1
GND3: C12.1 D4.3 J19.2 J19.4 J20.2 J20.4 J21.2 J21.4
GND4: C14.1 D5.3 J22.2 J22.4 J23.2 J23.4 J24.2 J24.4
GND5: C15.1 D6.3 J25.2 J25.4 J26.2 J26.4 J27.2 J27.4
GND6: C16.1 D7.3 J28.2 J28.4 J29.2 J29.4 J30.2 J30.4
GND7: C17.1 D8.3 J31.2 J31.4 J32.2 J32.4 J33.2 J33.4
GND8: C18.1 D9.3 J34.2 J34.4 J35.2 J35.4 J36.2 J36.4
GND9: C19.1 D10.3 J37.2 J37.4 J38.2 J38.4 J39.2 J39.4
GND10: C20.1 D11.3 J40.2 J40.4 J41.2 J41.4 J42.2 J42.4
GND11: C21.1 D12.3 J43.2 J43.4 J44.2 J44.4 J45.2 J45.4
GND12: C22.1 D13.3 J46.2 J46.4 J47.2 J47.4 J48.2 J48.4
GND13: C23.1 D14.3 J49.2 J49.4 J50.2 J50.4 J51.2 J51.4
GND14: C24.1 D15.3 J52.2 J52.4 J53.2 J53.4 J54.2 J54.4
GND15: C25.1 D16.3 J55.2 J55.4 J56.2 J56.4 J57.2 J57.4
GND16: C26.1 D17.3 J58.2 J58.4 J59.2 J59.4 J60.2 J60.4
GND17: C27.1 D18.3 J61.2 J61.4 J62.2 J62.4 J63.2 J63.4
GND18: C28.1 D19.3 J64.2 J64.4 J65.2 J65.4 J66.2 J66.4
GND19: C29.1 D20.3 J67.2 J67.4 J68.2 J68.4 J69.2 J69.4
GND20: C30.1 D21.3 J70.2 J70.4 J71.2 J71.4 J72.2 J72.4
GND21: C31.1 D22.3 J73.2 J73.4 J74.2 J74.4 J75.2 J75.4
GND22: C32.1 D23.3 J76.2 J76.4 J77.2 J77.4 J78.2 J78.4
GND23: C33.1 D24.3 J79.2 J79.4 J80.2 J80.4 J81.2 J81.4
GND24: C34.1 D25.3 J82.2 J82.4 J83.2 J83.4 J84.2 J84.4 J85.2 J85.4
GND25: C35.1 D26.3 J86.2 J86.4 J87.2 J87.4 J88.2 J88.4 J89.2 J89.4
GND26: C36.1 D27.3 J90.2 J90.4 J91.2 J91.4 J92.2 J92.4 J93.2 J93.4
GND27: C37.1 D28.3 J94.2 J94.4 J95.2 J95.4 J96.2 J96.4 J97.2 J97.4
GND28: C38.1 D29.3 J98.2 J98.4 J99.2 J99.4 J100.2 J100.4 J101.2 J101.4
GND29: C39.1 D30.3 J102.2 J102.4 J103.2 J103.4 J104.2 J104.4 J105.2 J105.4
GND30: C40.1 D31.3 J106.2 J106.4 J107.2 J107.4 J108.2 J108.4 J109.2 J109.4
MISO: ATMEGA32U4.11 PRG.1
MOSI: ATMEGA32U4.10 PRG.4
N$1: J1.3 JP2.2
N$2: J2.3 JP1.2
N$3: D1.2 R1.1
N$4: J7.3 JP4.2
N$5: J6.3 JP3.2
N$6: J5.3 JP5.2
N$7: D2.2 R2.1
N$8: ATMEGA32U4.16 C6.1 Y1.1
N$9: ATMEGA32U4.17 C5.1 Y1.2
N$10: J3.D- R7.2
N$11: J3.D+ R5.2
N$12: D3.- R6.2
N$13: J9.3 J10.3 R4.2
N$14: J11.3 J12.3 R8.2
N$15: J13.3 J14.3 R9.2
N$16: J15.3 J16.3 R10.2
N$17: J17.3 J18.3 R11.2
N$18: J20.3 JP7.2
N$19: D4.2 R12.1
N$20: J21.3 JP6.2
N$21: J23.3 JP9.2
N$22: D5.2 R13.1
N$23: J24.3 JP8.2
N$24: J26.3 JP11.2
N$25: D6.2 R14.1
N$26: J27.3 JP10.2
N$27: J29.3 JP13.2
N$28: D7.2 R15.1
N$29: J30.3 JP12.2
N$30: J32.3 JP15.2
N$31: D8.2 R16.1
N$32: J33.3 JP14.2
N$33: J35.3 JP17.2
N$34: D9.2 R17.1
N$35: J36.3 JP16.2
N$36: J38.3 JP19.2
N$37: D10.2 R18.1
N$38: J39.3 JP18.2
N$39: J41.3 JP21.2
N$40: D11.2 R19.1
N$41: J42.3 JP20.2
N$42: J44.3 JP23.2
N$43: D12.2 R20.1
N$44: J45.3 JP22.2
N$45: J47.3 JP25.2
N$46: D13.2 R21.1
N$47: J48.3 JP24.2
N$48: J50.3 JP27.2
N$49: D14.2 R22.1
N$50: J51.3 JP26.2
N$51: J53.3 JP29.2
N$52: D15.2 R23.1
N$53: J54.3 JP28.2
N$54: J56.3 JP31.2
N$55: D16.2 R24.1
N$56: J57.3 JP30.2
N$57: J59.3 JP33.2
N$58: D17.2 R25.1
N$59: J60.3 JP32.2
N$60: J62.3 JP35.2
N$61: D18.2 R26.1
N$62: J63.3 JP34.2
N$63: J65.3 JP37.2
N$64: D19.2 R27.1
N$65: J66.3 JP36.2
N$66: J68.3 JP39.2
N$67: D20.2 R28.1
N$68: J69.3 JP38.2
N$69: J71.3 JP41.2
N$70: D21.2 R29.1
N$71: J72.3 JP40.2
N$72: J74.3 JP43.2
N$73: D22.2 R30.1
N$74: J75.3 JP42.2
N$75: J77.3 JP45.2
N$76: D23.2 R31.1
N$77: J78.3 JP44.2
N$78: J80.3 JP47.2
N$79: D24.2 R32.1
N$80: J81.3 JP46.2
N$81: J84.3 JP49.2
N$82: J83.3 JP48.2
N$83: J82.3 JP50.2
N$84: D25.2 R33.1
N$85: J88.3 JP52.2
N$86: J87.3 JP51.2
N$87: J86.3 JP53.2
N$88: D26.2 R34.1
N$89: J92.3 JP55.2
N$90: J91.3 JP54.2
N$91: J90.3 JP56.2
N$92: D27.2 R35.1
N$93: J96.3 JP58.2
N$94: J95.3 JP57.2
N$95: J94.3 JP59.2
N$96: D28.2 R36.1
N$97: J100.3 JP61.2
N$98: J99.3 JP60.2
N$99: J98.3 JP62.2
N$100: D29.2 R37.1
N$101: J104.3 JP64.2
N$102: J103.3 JP63.2
N$103: J102.3 JP65.2
N$104: D30.2 R38.1
N$105: J108.3 JP67.2
N$106: J107.3 JP66.2
N$107: J106.3 JP68.2
N$108: D31.2 R39.1
RESET: ATMEGA32U4.13 PRG.5 R3.1 RESET.2
RXI: ATMEGA32U4.20
SCK: ATMEGA32U4.9 PRG.3
TXLED: ATMEGA32U4.22 R6.1
TXO: ATMEGA32U4.21
UCAP: ATMEGA32U4.6 C7.2
VIN: C1.2 D1.1 J1.1 J1.5 J2.1 J2.5 J4.1 J4.5
VIN1: C2.2 D2.1 J5.1 J5.5 J6.1 J6.5 J7.1 J7.5 J8.1 J8.5
VIN2: C12.2 D4.1 J19.1 J19.5 J20.1 J20.5 J21.1 J21.5
VIN3: C14.2 D5.1 J22.1 J22.5 J23.1 J23.5 J24.1 J24.5
VIN4: C15.2 D6.1 J25.1 J25.5 J26.1 J26.5 J27.1 J27.5
VIN5: C16.2 D7.1 J28.1 J28.5 J29.1 J29.5 J30.1 J30.5
VIN6: C17.2 D8.1 J31.1 J31.5 J32.1 J32.5 J33.1 J33.5
VIN7: C18.2 D9.1 J34.1 J34.5 J35.1 J35.5 J36.1 J36.5
VIN8: C19.2 D10.1 J37.1 J37.5 J38.1 J38.5 J39.1 J39.5
VIN9: C20.2 D11.1 J40.1 J40.5 J41.1 J41.5 J42.1 J42.5
VIN10: C21.2 D12.1 J43.1 J43.5 J44.1 J44.5 J45.1 J45.5
VIN11: C22.2 D13.1 J46.1 J46.5 J47.1 J47.5 J48.1 J48.5
VIN12: C23.2 D14.1 J49.1 J49.5 J50.1 J50.5 J51.1 J51.5
VIN13: C24.2 D15.1 J52.1 J52.5 J53.1 J53.5 J54.1 J54.5
VIN14: C25.2 D16.1 J55.1 J55.5 J56.1 J56.5 J57.1 J57.5
VIN15: C26.2 D17.1 J58.1 J58.5 J59.1 J59.5 J60.1 J60.5
VIN16: C27.2 D18.1 J61.1 J61.5 J62.1 J62.5 J63.1 J63.5
VIN17: C28.2 D19.1 J64.1 J64.5 J65.1 J65.5 J66.1 J66.5
VIN18: C29.2 D20.1 J67.1 J67.5 J68.1 J68.5 J69.1 J69.5
VIN19: C30.2 D21.1 J70.1 J70.5 J71.1 J71.5 J72.1 J72.5
VIN20: C31.2 D22.1 J73.1 J73.5 J74.1 J74.5 J75.1 J75.5
VIN21: C32.2 D23.1 J76.1 J76.5 J77.1 J77.5 J78.1 J78.5
VIN22: C33.2 D24.1 J79.1 J79.5 J80.1 J80.5 J81.1 J81.5
VIN23: C34.2 D25.1 J82.1 J82.5 J83.1 J83.5 J84.1 J84.5 J85.1 J85.5
VIN24: C35.2 D26.1 J86.1 J86.5 J87.1 J87.5 J88.1 J88.5 J89.1 J89.5
VIN25: C36.2 D27.1 J90.1 J90.5 J91.1 J91.5 J92.1 J92.5 J93.1 J93.5
VIN26: C37.2 D28.1 J94.1 J94.5 J95.1 J95.5 J96.1 J96.5 J97.1 J97.5
VIN27: C38.2 D29.1 J98.1 J98.5 J99.1 J99.5 J100.1 J100.5 J101.1 J101.5
VIN28: C39.2 D30.1 J102.1 J102.5 J103.1 J103.5 J104.1 J104.5 J105.1 J105.5
VIN29: C40.2 D31.1 J106.1 J106.5 J107.1 J107.5 J108.1 J108.5 J109.1 J109.5